# Altium PCB SignalAnalyse.PcbDoc (part 1 of 3)
Units mil, origin at the board's own origin, x right, y up, seen from the top; angles counter-clockwise.
Board outline 4204.03 x 1800 mil, 2 copper layers (Top Layer, Bottom Layer); 94 components, 52 nets, 372 pads, 56 vias.
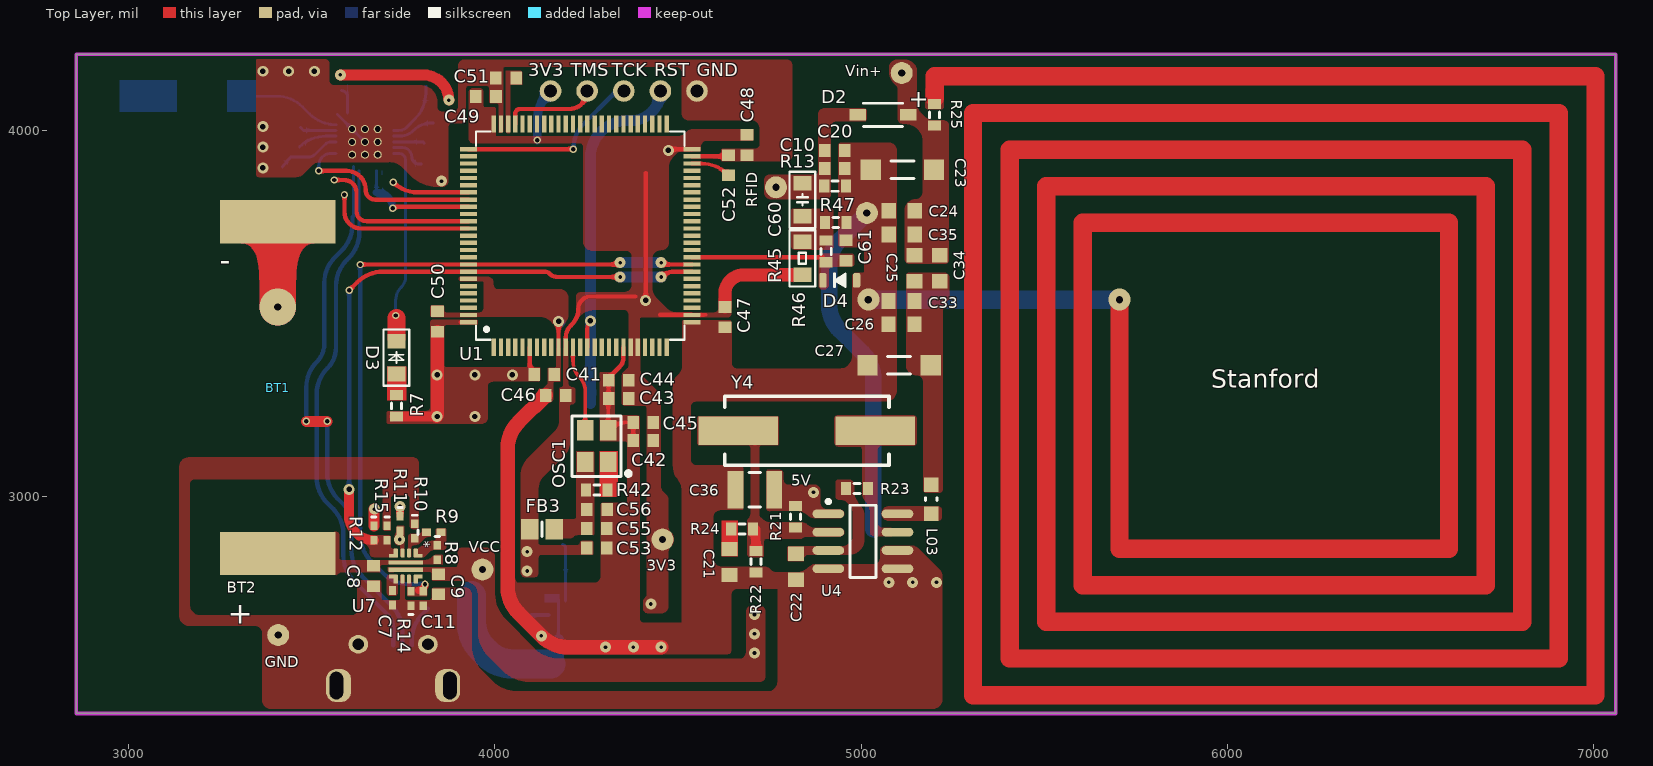
[diagram p0: Top Layer view]
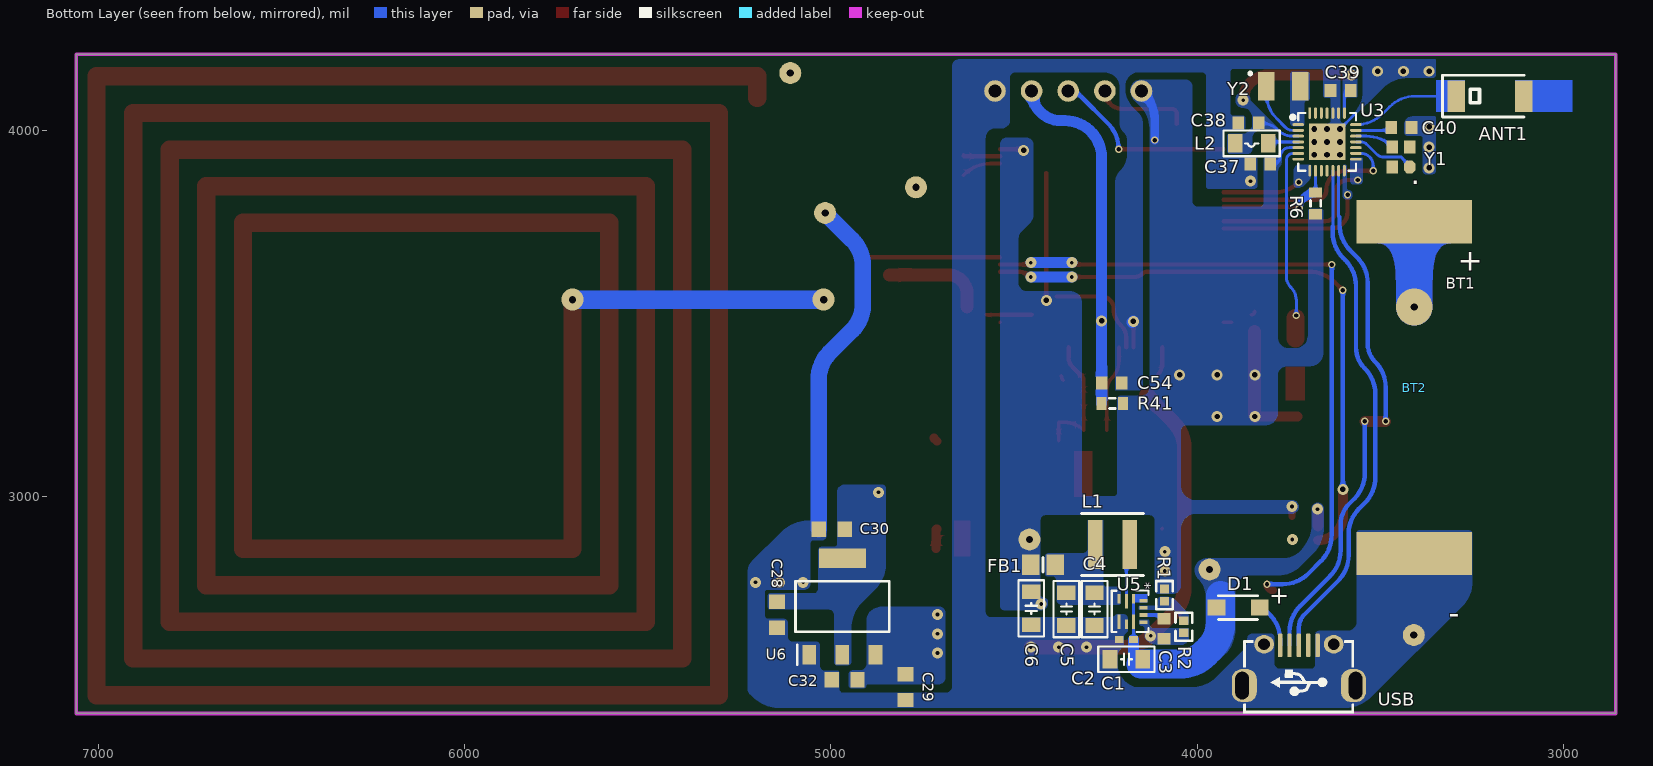
[diagram p1: Bottom Layer view, seen from below]

## Layer stack, top to bottom
Top Solder: solder mask 0.4, Solder Resist, Dk 3.5
Top Layer: signal copper 1.4
Dielectric 1: dielectric 12.6, FR-4, Dk 4.8
Bottom Layer: signal copper 1.4
Bottom Solder: solder mask 0.4, Solder Resist, Dk 3.5

## Board outline
2856.97,2407 7061,2407 7061,4207 2856.97,4207

## Design rules (kind name [scope] priority, off if disabled: settings)
Clearance [All] p1: gap=7 ignorepadtopadclearanceinfootprint=FALSE
PlaneClearance [All] p1: clearance=15
PlaneConnect [All] p1: planeconnectstyle=Direct reliefexpansion=20 reliefentries=4 reliefconductorwidth=10 reliefairgap=10
PolygonConnect [All] p1: connectstyle=Direct reliefconductorwidth=10 reliefentries=4 polygonreliefangle="90 Angle" airgapwidth=10
RoutingVias [All] p1: holewidth=15 width=30 viastyle="Through Hole" minholewidth=8 minwidth=20 maxholewidth=50 maxwidth=80
SolderMaskExpansion [All] p1: expansion=4
Width [All] p1: maxlimit=100 minlimit=7 preferedwidth=10
28 further rules are at their usual default settings.

## Classes and differential pairs
component class RFID_transmitter_V2: BT1 BT2 C1 C2 C3 C4 C5 C6 C7 C8 C9 C10 C11 C20 C21 C22 C23 C24 C25 C26 C27 C28 C29 C30 C32 C33 C34 C35 C36 D1 D2 FB1 L1 L03 R1 R2 R8 R9 R10 R11 R12 R13 R14 R15 R21 R22 R23 R24 R25 U4 U5 U6 U7 Y4
component class SignalAnalyse: ANT1 C37 C38 C39 C40 C41 C42 C43 C44 C45 C46 C47 C48 C49 C50 C51 C52 C53 C54 C55 C56 C60 C61 D3 D4 FB3 L2 OSC1 R6 R7 R41 R42 R45 R46 R47 U1 U3 USB Y1 Y2

## Components (designator, comment, footprint, x,y, rotation, side; value= is the part's Value field where it differs from the comment)
ANT1 "2450AT42A100E" ANTC5020X110N 3200,4093 r180 bottom
BT1 "Battery" Battery 3407,3297 r90 top
BT2 "Battery" Battery 3407,3297 r270 bottom
C1 "Multilayer Ceramic Capacitor" C0805 4193,2555 r0 bottom value=22uF
C2 "Cap Semi" 0402 4193.31,2609 r180 bottom value=2.2nF
C3 "Cap Semi" 1608[0603] 4090,2638 r90 bottom value=470nF
C4 "Multilayer Ceramic Capacitor" C0805 4280,2692 r270 bottom value=47uF
C5 "Multilayer Ceramic Capacitor" C0805 4357,2692 r270 bottom value=47uF
C6 "Multilayer Ceramic Capacitor" C0805 4453,2694 r270 bottom value=47uF
C7 "Cap Semi" 0402 3720.55,2723.02 r90 top value=1.3nF
C8 "Cap Semi" 1608[0603] 3668.55,2782.26 r90 top value=1μF
C9 "Cap Semi" 1608[0603] 3846.55,2759.7 r90 top value=10μF
C10 "Cap 100n" 1608[0603] 4928,3896 r0 top value=47nF
C11 "Cap Semi" 0402 3804.55,2720.7 r90 top value=100nF
C20 "Cap 100n" 1608[0603] 4928.56,3945 r0 top value=100nF
C21 "Cap 820p" 0603 4641,2820.57 r90 top value=820pF
C22 "Cap 200p" 0603 4822,2808 r90 top value=200pF
C23 "Cap Var" Variable_Capacitor_JZ400HV1 5113,3892 r0 top value=100pF
C24 "Cap" 0603 5111,3780 r0 top value=22pF
C25 "Cap" 0603 5146,3623 r270 top value=27pF
C26 "random value needs carefully address" 0603 5110.57,3470 r180 top value=470pF
C27 "Cap Var" Variable_Capacitor_JZ400HV1 5104,3358 r0 top value=100pF
C28 "Cap 100n" 0603 5147,2677 r90 bottom value=100nF
C29 "Cap 10u" 0603 4796,2479 r90 bottom value=10uF
C30 "Cap 22u" 0603 4998,2910 r180 bottom value=22uF
C32 "Cap 10n" 0603 4963,2499 r180 bottom value=10nF
C33 "random value needs carefully address" 0603 5110.57,3533 r180 top value=1pF
C34 "Cap" 0603 5215,3623 r270 top value=1pF
C35 "Cap" 0603 5111,3715 r0 top value=1pF
C36 "C3225C0G1H104JT000N" C1210 4710,3018.15 r180 top value=100nF
C37 "GRM188R61A226ME15D" 1608[0603] 3827.56,3908 r180 bottom value=2.2uF
C38 "GRM188R61A226ME15D" 1608[0603] 3859.44,4020 r180 bottom value=2.2uF
C39 "GRM188R61A226ME15D" 1608[0603] 3608.06,4108 r0 bottom value=0.1uF
C40 "GRM188R61A226ME15D" 1608[0603] 3442,4007 r0 bottom value=2.2uF
C41 "GRM188R61A226ME15D" 1608[0603] 4134.44,3333 r0 top value=1uF
C42 "GRM188R61A226ME15D" 1608[0603] 4405.44,3152 r180 top value=1uF
C43 "GRM188R61A226ME15D" 1608[0603] 4338,3267 r0 top value=1uF
C44 "GRM188R61A226ME15D" 1608[0603] 4338,3317 r0 top value=100nF
C45 "GRM188R61A226ME15D" 1608[0603] 4405.44,3202 r180 top value=100nF
C46 "GRM188R61A226ME15D" 1608[0603] 4166,3276 r0 top value=100nF
C47 "GRM188R61A226ME15D" 1608[0603] 4628,3489.56 r90 top value=100nF
C48 "GRM188R61A226ME15D" 1608[0603] 4688,3959.56 r90 top value=100nF
C49 "GRM188R61A226ME15D" 1608[0603] 3975.44,4092 r180 top value=100nF
C50 "GRM188R61A226ME15D" 1608[0603] 3843,3477.44 r270 top value=100nF
C51 "GRM188R61A226ME15D" 1608[0603] 4030.44,4142 r0 top value=2.2uF
C52 "GRM188R61A226ME15D" 1608[0603] 4638,3904.44 r270 top value=2.2uF
C53 "GRM188R61A226ME15D" 1608[0603] 4278.56,2859 r180 top value=4.7uF
C54 "GRM188R61A226ME15D" 1608[0603] 4233.44,3309 r180 bottom value=100nF
C55 "GRM188R61A226ME15D" 1608[0603] 4278.56,2912 r0 top value=10uF
C56 "GRM188R61A226ME15D" 1608[0603] 4279,2964 r0 top value=100nF
C60 "Cap Ceramic" C0805 4840,3810 r90 top value=22uF
C61 "Cap Semi" 1608[0603] 4959,3671.44 r270 top value=33nF
D1 "Diode" SODFL3616X98N 3888,2696 r180 bottom
D2 "Diode" SOD3716X135N 5060.1,4042 r0 top
D3 "LED-Green" D0805 3731,3379 r90 top
D4 "TDZ3V0J" SOD-323 4942,3590 r180 top
FB1 "Beed" BEADC2012X110N 4420.54,2813 r0 bottom
FB3 "Bead" BEADC2012X110N 4129,2910 r180 top
L1 "XGL4030" XGL4030 4231,2868 r180 bottom value=4.7uH
L2 "22uH" L0805 3851,3964 r0 bottom
L03 "Inductor 220 nH" Ferrite_bead_0805inch_2012mm 5192,2992 r90 top
OSC1 "16MHz" OSC_3.2X2.5 4278,3137 r90 top
R1 "14.7KΩ ±1%" LC-0402_R 4089,2730 r90 bottom
R2 "4.7KΩ ±1%" LC-0402_R 4036,2643.73 r90 bottom
R6 "Res 2.2KΩ ±1%" J1-0603 3676,3800 r90 bottom value=100K
R7 "Res 2.2KΩ ±1%" J1-0603 3731,3247 r90 top value=1K
R8 "Res 2.2KΩ ±1%" 0402-A 3842.55,2846.7 r270 top value=360K
R9 "Res 2.2KΩ ±1%" 0402-A 3833,2902 r0 top value=56K
R10 "Res 2.2KΩ ±1%" 0402-A 3780.99,2905 r270 top value=42.2K
R11 "Res 2.2KΩ ±1%" 0402-A 3741,2925.69 r270 top value=47K
R12 "Res 2.2KΩ ±1%" 0402-A 3669.55,2899.7 r270 top value=147K
R13 "Res 12.7KΩ ±1%" J1-0603 4929,3847 r180 top value=12.7K
R14 "Res 2.2KΩ ±1%" 0402-A 3770.55,2720.7 r90 top value=2.2K
R15 "Res 2.2KΩ ±1%" 0402-A 3705.55,2899.7 r270 top value=34K
R21 "Res 2.2KΩ ±1%" J1-0603 4821.15,2944.15 r90 top value=2.2K
R22 "Res 2.2KΩ ±1%" J1-0603 4713,2821.57 r90 top value=2.2K
R23 "Res 2.2KΩ ±1%" J1-0603 4989,3021 r0 top value=2.2K
R24 "Res 2.2KΩ ±1%" J1-0603 4675,2911 r180 top value=22Ohm
R25 "Res 2.2KΩ ±1%" J1-0603 5201,4042 r90 top value="1.0-antenna resistance value"
R41 "Res 2.2KΩ ±1%" J1-0603 4231.47,3254 r180 bottom value=10K
R42 "Res 2.2KΩ ±1%" J1-0603 4278.47,3017 r180 top value=1K
R45 "R" R0805 4840,3650 r90 top value=12K
R46 "Res 2.2KΩ ±1%" J1-0603 4905,3668.78 r270 top value=1K
R47 "Res 2.2KΩ ±1%" J1-0603 4931,3748 r0 top value=10K
U1 "STM32F767VIT6" STM32F767VIT6 4233,3712 r90 top value=Value
U3 "CH9143" QFN28_4X4 3644.98,3968.03 r270 bottom
U4 "LT1016" LT1016_SOIC 5005.16,2877.15 r0 top
U5 "XPS62912RPUR" VQFN-HR10_RPU_TEX 4183.12,2685.5 r270 bottom
U6 "LT1117IST-5#PBF" SOT230P700X180-4N 4969,2699 r90 bottom
U7 "LM73100RPWR" VQFN-HR-10_2X2_TEX 3756.55,2809.54 r270 top
USB "MicroUSB" USB_Micro-AB 3722,2493 r0 bottom
Y1 "32M" SMD2016-4N 3443,3927 r270 bottom
Y2 "32.768K" Q13FC1350000400 3765.06,4120 r180 bottom
Y4 "CRYSTAL" HC-49SMD 4852,3179 r180 top

## Footprints (in the part's own frame and the unit in brackets; to place one, negate y for a bottom-side part, rotate by r counter-clockwise, add the part's x,y. Pads: shape width x height; smd on the part's side, far side on the other; paste and mask are expansions set on the pad)
0402 [mm] "Chip Capacitor, Body 1.0x0.5mm, IPC High Density"
  rect 0.6x0.5 smd: 1(-0.5,0) 2(0.5,0)
  body extent -0.55,-0.3 0.55,0.3, height 1.3
0402-A [mm] "Chip Inductor, Body 1.0x0.5mm, IPC High Density"
  rect 0.6x0.5 smd: 1(-0.5,0) 2(0.5,0)
  silkscreen extent -1.1,-0.15 -1.1,0.15, body extent -0.55,-0.3 0.55,0.3, height 0.55
0603 [mm] "0603Resistor_Capacitor"
  rect 1x1.1 smd: 1(-0.9,0) 2(0.9,0)
  body extent -0.77,-0.45 0.77,0.45, height 0.45
1608[0603] [mm] "Chip Capacitor, Body 1.6x0.8mm, IPC High Density"
  rect 0.8x0.9 smd: 1(-0.7,0) 2(0.7,0)
  body extent -0.87,-0.48 0.87,0.48, height 1.3
ANTC5020X110N [mm]
  rect 1.2x2.2 smd: 1(-2.35,0) 2(2.35,0)
  silkscreen extent -3.3,-1.45 2.35,1.45, body extent -2.5,-1 2.5,1, height 1.1
Battery [mm]
  rect 3x8 smd: 1(-11.508,0) 2(11.508,0)
BEADC2012X110N [mm]
  rect 1.2x1.4 smd: 1(-0.85,0) 2(0.85,0)
  silkscreen extent 0,-0.5 0,0.5, body extent -1,-0.6 1,0.6, height 1.1
C0805 [mil]
  rect 40x50 smd: 1(45,0) 2(-45,0)
  silkscreen extent -77,-35 77,35, body extent -49,-24 49,25, height 31
C1210 [mm] "Chip Capacitor, Body 3.2x2.5mm, IPC High Density"
  rect 1.1x2.6 smd: 1(-1.35,0) 2(1.35,0)
  silkscreen extent -0.4,-1.2 0.4,1.2, body extent -1.7,-1.35 1.7,1.35, height 1.3
D0805 [mil]
  rect 40x50 smd: 1(-45,0) 2(45,0)
  silkscreen extent -77,-35 77,35, body extent -40,-25 40,25, height 43
Ferrite_bead_0805inch_2012mm [mm] "Ferrite_bead_MH2029-300Y"
  rect 1x1 smd: 1(-1,0) 2(1,0)
  silkscreen extent -0.1,-0.4 0.1,0.4, body extent -1.1,-0.7 1.1,0.7, height 1.1
HC-49SMD [mm] "HC49/4HSMX"
  rect 5.5x2 smd: 1(-4.75,0) 2(4.75,0)
  silkscreen extent -5.7,-2.4 5.7,2.4, body extent -6.7,-2.46 6.7,2.44, height 4.3
J1-0603 [mm] "Chip Resistor, Body 1.6x0.8mm, IPC High Density"
  rect 0.7x0.9 smd: 1(-0.75,0) 2(0.75,0)
  silkscreen extent -0.2,-0.35 0.2,0.35, body extent -0.85,-0.48 0.85,0.48, height 0.9
L0805 [mil]
  rect 40x50 smd: 1(45,0) 2(-45,0)
  silkscreen extent -77,-35 77,35, body extent -49,-24 49,25, height 31
LC-0402_R [mm]
  rect 0.6x0.65 smd mask+0.051: 1(-0.425,0) 2(0.425,0)
  silkscreen extent -0.97,-0.58 0.97,0.58, body extent -0.57,-0.27 0.57,0.28, height 0.41
LT1016_SOIC [mm] "LT1016_Comparator_SOIC"
  oval 2.2x0.6 smd: 1(-2.4,1.905) 2(-2.4,0.635) 3(-2.4,-0.635) 4(-2.4,-1.905) 5(2.4,-1.905) 6(2.4,-0.635) 7(2.4,0.635) 8(2.4,1.905)
  silkscreen extent -2.52,-2.5 0.9,2.88, body extent -2,-2.5 2,2.5, height 1.76
OSC_3.2X2.5 [mm] "SG-310SCF SMD-3225_4P"
  rect 1.4x1.15 smd: 1(-1.1,-0.8) 2(1.1,-0.8) 3(1.1,0.8) 4(-1.1,0.8)
  silkscreen extent -2.1,-2.35 2.1,1.7, body extent -1.6,-1.25 1.6,1.25, height 0.61
Q13FC1350000400 [mm] "FC-135, 2-Leads, Body 1.50x3.20mm, Pitch 2.35mm, IPC Medium Density"
  rect 1.15x1.95 smd: 1(-1.175,0) 2(1.175,0)
  silkscreen extent -2.39,0.79 -2.19,0.99, body extent -1.67,-0.9 1.68,0.9, height 0.9
QFN28_4X4 [mm]
  round 0.559 hole 0.406: 0(-0.888,-0.89) 0(-0.888,-0.002) 0(-0.888,0.885) 0(0.001,-0.89) 0(0.001,-0.002) 0(0.001,0.885) 0(0.89,-0.89) 0(0.89,-0.002) 0(0.89,0.885)
  rect 2.54x2.54 smd: 0(0,0)
  oval 0.2x0.8 smd: 1(-1.2,-2) 2(-0.8,-2) 3(-0.4,-2) 4(0,-2) 5(0.4,-2) 6(0.8,-2) 7(1.2,-2) 15(1.2,2) 16(0.8,2) 17(0.4,2) 18(0,2) 19(-0.4,2) 20(-0.8,2) 21(-1.2,2)
  oval 0.8x0.2 smd: 8(2,-1.2) 9(2,-0.8) 10(2,-0.4) 11(2,0) 12(2,0.4) 13(2,0.8) 14(2,1.2) 22(-2,1.2) 23(-2,0.8) 24(-2,0.4) 25(-2,0) 26(-2,-0.4) 27(-2,-0.8) 28(-2,-1.2)
  silkscreen extent -2,-2.51 2,2
R0805 [mil]
  rect 40x50 smd: 1(45,0) 2(-45,0)
  silkscreen extent -77,-35 77,35, body extent -39,-25 39,25, height 31
SMD2016-4N [mm]
  oct 0.9x0.8 smd: 1(0.7,0.6)
  rect 0.9x0.8 smd: 2(-0.7,0.6) 3(-0.7,-0.6) 4(0.7,-0.6)
  body extent -0.85,-1 0.85,1, height 0.5
SOD3716X135N [mm]
  rect 1.15x0.8 smd: 1(-1.75,0) 2(1.75,0)
  silkscreen extent -1.35,-0.8 1.35,0.8, body extent -1.86,-0.8 1.86,0.8, height 1.35
SOD-323 [mil]
  rrect50% 20x40 smd: 1(-46,0) 2(46,0)
  silkscreen extent -16,-18 16,18, body extent -51,-27 51,27, height 43
SODFL3616X98N [mm]
  rect 1.24x1.12 smd: 1(-1.5,0) 2(1.5,0)
  silkscreen extent -1.35,-0.82 1.35,0.82, body extent -1.8,-0.83 1.8,0.83, height 0.98
SOT230P700X180-4N [mm]
  rect 1.35x0.95 smd: 1(-3.35,2.3) 2(-3.35,0) 3(-3.35,-2.3)
  rect 1.35x3.25 smd: 4(3.35,0)
  silkscreen extent -4.03,-3.25 1.75,3.25, body extent -3.5,-3.25 3.5,3.25, height 1.8
STM32F767VIT6 [mm] "LQPF100, 100-Leads, Body 14.00x14.00mm, Pitch 0.50mm, IPC Medium Density"
  rect 1.2x0.3 smd: 1(-7.75,6) 2(-7.75,5.5) 3(-7.75,5) 4(-7.75,4.5) 5(-7.75,4) 6(-7.75,3.5) 7(-7.75,3) 8(-7.75,2.5) 9(-7.75,2) 10(-7.75,1.5) 11(-7.75,1) 12(-7.75,0.5) 13(-7.75,0) 14(-7.75,-0.5) 15(-7.75,-1) 16(-7.75,-1.5) 17(-7.75,-2) 18(-7.75,-2.5) 19(-7.75,-3) 20(-7.75,-3.5) 21(-7.75,-4) 22(-7.75,-4.5) 23(-7.75,-5) 24(-7.75,-5.5) 25(-7.75,-6) 51(7.75,-6) 52(7.75,-5.5) 53(7.75,-5) 54(7.75,-4.5) 55(7.75,-4) 56(7.75,-3.5) 57(7.75,-3) 58(7.75,-2.5) 59(7.75,-2) 60(7.75,-1.5) 61(7.75,-1) 62(7.75,-0.5) 63(7.75,0) 64(7.75,0.5) 65(7.75,1) 66(7.75,1.5) 67(7.75,2) 68(7.75,2.5) 69(7.75,3) 70(7.75,3.5) 71(7.75,4) 72(7.75,4.5) 73(7.75,5) 74(7.75,5.5) 75(7.75,6)
  rect 0.3x1.2 smd: 26(-6,-7.75) 27(-5.5,-7.75) 28(-5,-7.75) 29(-4.5,-7.75) 30(-4,-7.75) 31(-3.5,-7.75) 32(-3,-7.75) 33(-2.5,-7.75) 34(-2,-7.75) 35(-1.5,-7.75) 36(-1,-7.75) 37(-0.5,-7.75) 38(0,-7.75) 39(0.5,-7.75) 40(1,-7.75) 41(1.5,-7.75) 42(2,-7.75) 43(2.5,-7.75) 44(3,-7.75) 45(3.5,-7.75) 46(4,-7.75) 47(4.5,-7.75) 48(5,-7.75) 49(5.5,-7.75) 50(6,-7.75) 76(6,7.75) 77(5.5,7.75) 78(5,7.75) 79(4.5,7.75) 80(4,7.75) 81(3.5,7.75) 82(3,7.75) 83(2.5,7.75) 84(2,7.75) 85(1.5,7.75) 86(1,7.75) 87(0.5,7.75) 88(0,7.75) 89(-0.5,7.75) 90(-1,7.75) 91(-1.5,7.75) 92(-2,7.75) 93(-2.5,7.75) 94(-3,7.75) 95(-3.5,7.75) 96(-4,7.75) 97(-4.5,7.75) 98(-5,7.75) 99(-5.5,7.75) 100(-6,7.75)
  silkscreen extent -7.23,-7.23 7.23,7.23, body extent -8,-8 8,8, height 1.6
USB_Micro-AB [mil]
  rrect80% 68x90 hole 37 slot 75 at 90 deg copper offset 6,0 mask+0: 0(-155,10)
  oval 54x50 hole 32 mask+0: 0(-95,-103) 0(95,-103)
  rrect80% 68x90 hole 37 slot 75 at 90 deg copper offset -6,0 mask+0: 0(155,10)
  rrect50% 12x64 smd: 1(51.18,-100) 2(25.59,-100) 3(0,-100) 4(-25.59,-100) 5(-51.18,-100)
  silkscreen extent -150,-112 150,86, body extent -161,-109 161,104, height 108
Variable_Capacitor_JZ400HV1 [mm] "Variable_Capacitor_JZ400HV"
  rect 1.4x1.4 smd: 1(-2.2,0) 2(2.2,0)
  silkscreen extent -0.8,-0.6 0.8,0.6, body extent -3.3,-1.72 3.05,1.73, height 1.45
VQFN-HR10_RPU_TEX [mil]
  rect 26x8 smd paste-4 mask+0: 1(-34.5,9.88) 3(-34.5,-29.62) 5(34.5,-9.88)
  rect 39x8 smd: 2(-28,-9.87) 4(28,-29.63) 6(28,9.87)
  rect 10x22 smd: 7(29.63,36.37) 8(9.88,36.38) 9(-9.87,36.38) 10(-29.62,36.38)
  silkscreen extent -57,-50 57,50, body extent -41,-40 41,40, height 39
VQFN-HR-10_2X2_TEX [mm]
  rrect17% 0.6x0.3 smd paste+0 mask+0.05: 1(-0.9,0.7) 4(-0.9,-0.7) 7(0.9,-0.7) 10(0.9,0.7)
  rrect20% 0.25x0.6 smd paste+0 mask+0.05: 1(-0.725,0.875) 4(-0.725,-0.875) 7(0.725,-0.875) 10(0.725,0.875)
  rrect20% 0.6x0.25 smd paste+0 mask+0.05: 2(-0.9,0.225) 3(-0.9,-0.225) 8(0.9,-0.225) 9(0.9,0.225)
  rrect17% 0.3x2.4 smd paste+0 mask+0.05: 5(-0.25,0) 6(0.25,0)
  body extent -1,-1 1,1, height 1
XGL4030 [mm] "Precision Wire Wound Inductor, 2-Leads, Body 4.00x4.00mm, IPC Medium Density"
  rect 1x3.4 smd: 1(-1.185,0) 2(1.185,0)
  silkscreen extent -2.15,-2.15 2.15,2.15, body extent -2.15,-2.15 2.15,2.15, height 3

## Part data
ANT1: "Antenna", Manufacturer_Name="JOHANSON TECHNOLOGY", Mouser Part Number=609-2450AT42A100E, Arrow Part Number=2450AT42A100E, Arrow Price/Stock=https://www.arrow.com/en/products/2450at42a100e/johanson-dielectrics, Datasheet Link=https://mouser.componentsearchengine.com/Datasheets/2/2450AT42A100E.pdf, Height=1.1mm, Manufacturer_Part_Number=2450AT42A100E, Mouser Price/Stock=https://www.mouser.co.uk/ProductDetail/Johanson-Technology/2450AT42A100E/?qs=yCnrNFeXz%252BhaJmvBFFPWJQ%3D%3D
BT1 BT2: "Multicell Battery", LatestRevisionDate=17-Jul-2002, LatestRevisionNote="Re-released for DXP Platform.", PackageDescription="Battery; 2 Leads", PackageReference=BAT-2, Published=24-Mar-1999, Publisher="Altium Limited"
C1: library part C-Ceramic, Manufacturer=TDK, Part Number=C2012X5R1V226M125AC, Voltage=35V
C2: "Capacitor (Semiconductor SIM Model)", Manufacturer=MuRata, Part Number=GRM155R71H222KA01D, Voltage=50V, LatestRevisionDate=29-May-2009, LatestRevisionNote="IPC-7351 Footprint Added.", PackageDescription="Chip Capacitor", PackageReference=C1206, Published=8-Jun-2000, Publisher="Altium Limited"
C3: "Capacitor (Semiconductor SIM Model)", Manufacturer=MuRata, Part Number=GRM188R60J474KA01D, Voltage=6.3V, LatestRevisionDate=29-May-2009, LatestRevisionNote="IPC-7351 Footprint Added.", PackageDescription="Chip Capacitor", PackageReference=C1206, Published=8-Jun-2000, Publisher="Altium Limited"
C4 C5 C6: library part C-Ceramic, Manufacturer=TDK, Part Number=C2012X5R1A476M125AC, Voltage=10V
C7: "多层陶瓷电容器MLCC - SMD/SMT 1.3nF 50VDC X7R 5% 0402", Manufacturer=MuRata, Part Number=GRM155R71H132JA01D, Voltage=50V, LatestRevisionDate=29-May-2009, LatestRevisionNote="IPC-7351 Footprint Added.", PackageDescription="Chip Capacitor", PackageReference=C1206, Published=8-Jun-2000, Publisher="Altium Limited"
C8: "多层陶瓷电容器MLCC - SMD/SMT 0603 1uF 25V X6S 10%", Manufacturer=MuRata, Part Number=GRM188C81E105KAADD, Voltage=25V, LatestRevisionDate=29-May-2009, LatestRevisionNote="IPC-7351 Footprint Added.", PackageDescription="Chip Capacitor", PackageReference=C1206, Published=8-Jun-2000, Publisher="Altium Limited"
C9: "Capacitor (Semiconductor SIM Model)", Manufacturer=MuRata, Part Number=GRM188R61E106KA73D, Voltage=25V, LatestRevisionDate=29-May-2009, LatestRevisionNote="IPC-7351 Footprint Added.", PackageDescription="Chip Capacitor", PackageReference=C1206, Published=8-Jun-2000, Publisher="Altium Limited"
C10: library part "Cap Semi", "Capacitor", Manufacturer=SAMSUNG, Part Number=CL10B473KB8NNNC, Voltage=50V, LatestRevisionDate=29-May-2009, LatestRevisionNote="IPC-7351 Footprint Added.", PackageDescription="Chip Capacitor", PackageReference=C1206, Published=8-Jun-2000, Publisher="Altium Limited"
C11: "多层陶瓷电容器MLCC - SMD/SMT 100nF 10VDC X5R 5% 0402", Manufacturer=MuRata, Part Number=GRM155R61A104JA01D, Voltage=10V, LatestRevisionDate=29-May-2009, LatestRevisionNote="IPC-7351 Footprint Added.", PackageDescription="Chip Capacitor", PackageReference=C1206, Published=8-Jun-2000, Publisher="Altium Limited"
C20: library part "Cap Semi", "Capacitor", Manufacturer=SAMSUNG, Part Number=CL10B104KB8NNNC, Voltage=50V, LatestRevisionDate=29-May-2009, LatestRevisionNote="IPC-7351 Footprint Added.", PackageDescription="Chip Capacitor", PackageReference=C1206, Published=8-Jun-2000, Publisher="Altium Limited"
C21 C22 C28 C30 C32: library part Cap, "Capacitor", LatestRevisionDate=17-Jul-2002, LatestRevisionNote="Re-released for DXP Platform.", PackageDescription="Radial Cap, Thru-Hole; 2 Leads; 0.3 in Pin Spacing", PackageReference=RAD-0.3, Published=8-Jun-2000, Publisher="Altium Limited"
C23 C27: "Variable or Adjustable Capacitor", Code_IPC=CAPC3225, Code_JEITA=1210, LatestRevisionDate=29-May-2009, LatestRevisionNote="IPC-7351 Footprint Added.", PackageDescription="Chip Capacitor 1210 Case Size", PackageReference=C1210, Published=24-Mar-1999, Publisher="Altium Limited"
C24 C25 C34 C35: "Capacitor_for resonance", LatestRevisionDate=17-Jul-2002, LatestRevisionNote="Re-released for DXP Platform.", PackageDescription="Radial Cap, Thru-Hole; 2 Leads; 0.3 in Pin Spacing", PackageReference=RAD-0.3, Published=8-Jun-2000, Publisher="Altium Limited"
C26 C33: library part Cap, "Capacitor_for resonance", LatestRevisionDate=17-Jul-2002, LatestRevisionNote="Re-released for DXP Platform.", PackageDescription="Radial Cap, Thru-Hole; 2 Leads; 0.3 in Pin Spacing", PackageReference=RAD-0.3, Published=8-Jun-2000, Publisher="Altium Limited"
C29: library part Cap, "Capacitor", Manufacturer=Murata, Part Number=GRM188R61E106KA73D, LatestRevisionDate=17-Jul-2002, LatestRevisionNote="Re-released for DXP Platform.", PackageDescription="Radial Cap, Thru-Hole; 2 Leads; 0.3 in Pin Spacing", PackageReference=RAD-0.3, Published=8-Jun-2000, Publisher="Altium Limited"
C36: library part "Cap Semi", "Capacitor (Semiconductor SIM Model)", Manufacturer=TDK, Voltage=10V, LatestRevisionDate=29-May-2009, LatestRevisionNote="IPC-7351 Footprint Added.", PackageDescription="Chip Capacitor", PackageReference=C1206, Part Number=C3225C0G1H104JT000N, Published=8-Jun-2000, Publisher="Altium Limited"
C37 C38 C39 C40 C53: library part "Cap Semi", "Capacitor (Semiconductor SIM Model)", Voltage=10V, LatestRevisionDate=29-May-2009, LatestRevisionNote="IPC-7351 Footprint Added.", PackageDescription="Chip Capacitor", PackageReference=C1206, Published=8-Jun-2000, Publisher="Altium Limited"
C41 C42 C43 C44 C45 C46 C47 C48 C49 C50 C54 C56: library part "Cap Semi", "Capacitor (Semiconductor SIM Model)", Voltage=50V, LatestRevisionDate=29-May-2009, LatestRevisionNote="IPC-7351 Footprint Added.", PackageDescription="Chip Capacitor", PackageReference=C1206, Published=8-Jun-2000, Publisher="Altium Limited"
C51 C52: library part "Cap Semi", "Capacitor (Semiconductor SIM Model)", Voltage=16V, LatestRevisionDate=29-May-2009, LatestRevisionNote="IPC-7351 Footprint Added.", PackageDescription="Chip Capacitor", PackageReference=C1206, Published=8-Jun-2000, Publisher="Altium Limited"
C55: library part "Cap Semi", "Capacitor (Semiconductor SIM Model)", Manufacturer=Murata, Part Number=GRM188R61E106KA73D, Voltage=10V, LatestRevisionDate=29-May-2009, LatestRevisionNote="IPC-7351 Footprint Added.", PackageDescription="Chip Capacitor", PackageReference=C1206, Published=8-Jun-2000, Publisher="Altium Limited"
C60: library part C-Ceramic, Voltage=25V
C61: "Capacitor (Semiconductor SIM Model)", Voltage=50V, LatestRevisionDate=29-May-2009, LatestRevisionNote="IPC-7351 Footprint Added.", PackageDescription="Chip Capacitor", PackageReference=C0603, Published=8-Jun-2000, Publisher="Altium Limited"
D1: library part MBR120VLSFT1G, "Schottky Power Rectifier, Surface Mount", Manufacturer_Name="ON Semiconductor", Mouser Part Number=863-MBR120VLSFT1G, Arrow Part Number=MBR120VLSFT1G, Arrow Price/Stock=https://www.arrow.com/en/products/mbr120vlsft1g/on-semiconductor, Datasheet Link=http://www.onsemi.com/pub/Collateral/MBR120VLSFT1-D.PDF, Height=0.98mm, Manufacturer_Part_Number=MBR120VLSFT1G, Mouser Price/Stock=https://www.mouser.co.uk/ProductDetail/ON-Semiconductor/MBR120VLSFT1G?qs=3JMERSakebpX%252BkItPpFCkg%3D%3D
D2: library part MBR0540T1G, "Surface Mount Schottky Power Rectifier", Manufacturer_Name="ON Semiconductor", Mouser Part Number=863-MBR0540T1G, Arrow Part Number=MBR0540T1G, Arrow Price/Stock=https://www.arrow.com/en/products/mbr0540t1g/on-semiconductor, Datasheet Link=http://www.onsemi.com/pub/Collateral/MBR0540T1-D.PDF, Height=1.35mm, Manufacturer_Part_Number=MBR0540T1G, Mouser Price/Stock=https://www.mouser.co.uk/ProductDetail/ON-Semiconductor/MBR0540T1G?qs=3JMERSakebqeY0cO5%252BUPCQ%3D%3D
D3: library part LED
D4: library part "D Zener", "Zener Diode 3V", LatestRevisionDate=17-Jul-2002, LatestRevisionNote="Re-released for DXP Platform.", PackageDescription="Diode, Thru-Hole; 2 Leads; 0.7 in Pin Spacing", PackageReference=DIODE-0.7, Published=8-Jun-2000, Publisher="Altium Limited"
FB1 FB3: library part 782853200, "Wurth Ferrite Bead", Manufacturer_Name="Wurth Elektronik", Datasheet Link=http://katalog.we-online.de/pbs/datasheet/782853200.pdf, Height=1.1mm, Manufacturer_Part_Number=782853200
L1: library part Inductor, "Coilcraft Shielded Power Inductors", Manufacturer=Coilcraft, Part Number=XGL4030-472MEC
L2: library part FB, Manufacturer=microgate, Part Number=MGFL2012F220
L03: library part Component_1, "220nH"
OSC1: library part OSC2, "OSC with disable function"
R1: library part "0402 1KΩ (1001) 1%", "贴片电阻", Manufacturer=Vishay-Dale, Package=0402, Part Number=CRCW040214K7FKED, ComponentLink1Description=供应商链接, ComponentLink1URL=http://www.szlcsc.com/product/details_12256.html
R2: library part "0402 1KΩ (1001) 1%", "贴片电阻", Manufacturers=Vishay-Dale, Package=0402, Part Number=CRCW04024K70FKED, ComponentLink1Description=供应商链接, ComponentLink1URL=http://www.szlcsc.com/product/details_12256.html
R6: library part Res1, "Resistor", Manufacturer=YAGEO, Part Number=RC0603FR-07100KL, LatestRevisionDate=17-Jul-2002, LatestRevisionNote="Re-released for DXP Platform.", PackageDescription="Axial Device, Thru-Hole; 2 Leads; 0.3 in Pin Spacing", PackageReference=AXIAL-0.3, Published=8-Jun-2000, Publisher="Altium Limited"
R7 R42 R46: library part Res1, "Resistor", Manufacturer=YAGEO, Part Number=RC0603FR-071KL, LatestRevisionDate=17-Jul-2002, LatestRevisionNote="Re-released for DXP Platform.", PackageDescription="Axial Device, Thru-Hole; 2 Leads; 0.3 in Pin Spacing", PackageReference=AXIAL-0.3, Published=8-Jun-2000, Publisher="Altium Limited"
R8: library part Res1, "Resistor", Manufacturer=YAGEO, Part Number=RC0402FR-07360KL, LatestRevisionDate=17-Jul-2002, LatestRevisionNote="Re-released for DXP Platform.", PackageDescription="Axial Device, Thru-Hole; 2 Leads; 0.3 in Pin Spacing", PackageReference=AXIAL-0.3, Published=8-Jun-2000, Publisher="Altium Limited"
R9: library part Res1, "Resistor", Manufacturer=YAGEO, Part Number=RC0402FR-0756KL, LatestRevisionDate=17-Jul-2002, LatestRevisionNote="Re-released for DXP Platform.", PackageDescription="Axial Device, Thru-Hole; 2 Leads; 0.3 in Pin Spacing", PackageReference=AXIAL-0.3, Published=8-Jun-2000, Publisher="Altium Limited"
R10 R21 R22 R23: library part Res1, "Resistor", Manufacturer=YAGEO, Part Number=RC0603FR-072K2L, LatestRevisionDate=17-Jul-2002, LatestRevisionNote="Re-released for DXP Platform.", PackageDescription="Axial Device, Thru-Hole; 2 Leads; 0.3 in Pin Spacing", PackageReference=AXIAL-0.3, Published=8-Jun-2000, Publisher="Altium Limited"
R11: library part Res1, "Resistor", Manufacturer=YAGEO, Part Number=RC0402FR-0747KL, LatestRevisionDate=17-Jul-2002, LatestRevisionNote="Re-released for DXP Platform.", PackageDescription="Axial Device, Thru-Hole; 2 Leads; 0.3 in Pin Spacing", PackageReference=AXIAL-0.3, Published=8-Jun-2000, Publisher="Altium Limited"
R12: library part Res1, "Resistor", Manufacturer=YAGEO, Part Number=RC0402FR-07147KL, LatestRevisionDate=17-Jul-2002, LatestRevisionNote="Re-released for DXP Platform.", PackageDescription="Axial Device, Thru-Hole; 2 Leads; 0.3 in Pin Spacing", PackageReference=AXIAL-0.3, Published=8-Jun-2000, Publisher="Altium Limited"
R13: library part Res3, "Resistor", Manufacturer=YAGEO, Part Number=RC0603FR-0712K7L, LatestRevisionDate=29-May-2009, LatestRevisionNote="IPC-7351 Footprint Added.", PackageDescription="Chip Resistor", PackageReference=J1-0603, Published=8-Jun-2000, Publisher="Altium Limited"
R14: library part Res1, "Resistor", Manufacturer=YAGEO, Part Number=RC0402FR-072K2L, LatestRevisionDate=17-Jul-2002, LatestRevisionNote="Re-released for DXP Platform.", PackageDescription="Axial Device, Thru-Hole; 2 Leads; 0.3 in Pin Spacing", PackageReference=AXIAL-0.3, Published=8-Jun-2000, Publisher="Altium Limited"
R15: library part Res1, "Resistor", Manufacturer=YAGEO, Part Number=RC0402FR-0734KL, LatestRevisionDate=17-Jul-2002, LatestRevisionNote="Re-released for DXP Platform.", PackageDescription="Axial Device, Thru-Hole; 2 Leads; 0.3 in Pin Spacing", PackageReference=AXIAL-0.3, Published=8-Jun-2000, Publisher="Altium Limited"
R24: library part Res1, "Resistor", Manufacturer=YAGEO, Part Number=RC0603FR-0722RL, LatestRevisionDate=17-Jul-2002, LatestRevisionNote="Re-released for DXP Platform.", PackageDescription="Axial Device, Thru-Hole; 2 Leads; 0.3 in Pin Spacing", PackageReference=AXIAL-0.3, Published=8-Jun-2000, Publisher="Altium Limited"
R25: library part Res1, "Resistor", Manufacturer=YAGEO, Part Number=RC0603FR-071RL, LatestRevisionDate=17-Jul-2002, LatestRevisionNote="Re-released for DXP Platform.", PackageDescription="Axial Device, Thru-Hole; 2 Leads; 0.3 in Pin Spacing", PackageReference=AXIAL-0.3, Published=8-Jun-2000, Publisher="Altium Limited"
R41 R47: library part Res1, "Resistor", Manufacturer=YAGEO, Part Number=RC0603FR-0710KL, LatestRevisionDate=17-Jul-2002, LatestRevisionNote="Re-released for DXP Platform.", PackageDescription="Axial Device, Thru-Hole; 2 Leads; 0.3 in Pin Spacing", PackageReference=AXIAL-0.3, Published=8-Jun-2000, Publisher="Altium Limited"
R45: library part "Res SMT", Manufacturer=YAGEO, Part Number=RC0805FR-0712KL
U1: library part STM32F76XVXT, "Imported", Manufacturer_Part_Number=stm32f76xvxt, C="Copyright (C) 2016 Accelerated Designs. All rights reserved", Copyright="Copyright (C) 2016 Accelerated Designs. All rights reserved", RefDes=RefDes, Type=Type, Vendor=STMicroelectronics
U3: "Bluetooth-LowEnergy & UART & USB Mutual Transport"
U5 U7: "No Description Available", Copyright="Copyright (C) 2018 Accelerated Designs. All rights reserved", RefDes=RefDes, Type=DEV, Vendor="Texas Instruments"
  U5: Built_By=EMA_Cory, Datasheet=https://www.ti.com/lit/ds/symlink/tps62913.pdf?ts=1598546293590&ref_url=https%253A%252F%252Fwww.ti.com%252Fproduct%252FTPS62913, Manufacturer_Part_Number=XPS62912RPUR, SourceLibrary=TI_2020-08-27
  U7: Built_By=EMA_Anthony, Datasheet=https://www.ti.com/lit/ds/symlink/lm7310.pdf?ts=1603393347029&ref_url=https%253A%252F%252Fwww.ti.com%252Fproduct%252FLM7310%253FHQS%253DTI-null-null-octopart-df-pf-null-wwe, Manufacturer_Part_Number=LM73100RPWR, SourceLibrary=Add_to_database_2020-10-23
USB: library part USB_Micro, "USB", Type=B-type
Y1: library part X201632MMB4SI, "Quartz Crystal Oscillator", Manufacturer_Name="Yangxing Tech", Datasheet Link=https://datasheet.lcsc.com/szlcsc/1904031205_Yangxing-Tech-X201632MMB4SI_C383840.pdf, Height=0.5mm, Manufacturer_Part_Number=X201632MMB4SI
Y2: library part Q13FC1350000400, "Crystal Oscillator", Manufacturer_Name="SEIKO EPSON", Datasheet Link=https://datasheet.lcsc.com/szlcsc/1901081604_Seiko-Epson-Q13FC1350000400_C32346.pdf, Height=0.9mm, Manufacturer_Part_Number=Q13FC1350000400
Y4: "Industry standard SMD crystal", Frequency=6.78M, Manufacturer=IQD, Part Number=LFXTAL057410Bulk

## Free pads (board coordinates)
  round 60 hole 20: 0(3408,2621) 0(3966,2800) 0(4458,2882) 2(4768,3844) 2(5016,3774) 2(5111,4156)
  round 59.06 hole 35.43: 1(4152,4107) 2(4252,4107) 3(4352,4107) 4(4452.01,4107) 5(4552.01,4107)

## Via types
v1: diameter 30, hole 10, Top Layer to Bottom Layer, tented both sides, 22 vias
v2: diameter 30, hole 15, Top Layer to Bottom Layer, tented both sides, 16 vias
v3: diameter 20, hole 12, Top Layer to Bottom Layer, tented both sides, 13 vias
v4: diameter 30, hole 10, Top Layer to Bottom Layer, 2 vias
v5: diameter 60, hole 20, Top Layer to Bottom Layer, 2 vias
v6: diameter 100, hole 20, Top Layer to Bottom Layer, 1 vias

## Nets (pads, with @x,y where several pads share a name; then routed paths per layer and width w, separated by ;. In a path a pad name is that pad's centre, name@x,y a point inside that pad or via, vN(x,y) a via of type N, cw(c..) or ccw(c..) an arc to the next point about the centre after c; other vN are vias at no path point)
3.3V: C6.2 C37.2 C41.1 C42.1 C43.2 C44.2 C45.1 C46.2 C47.2 C48.2 C49.2 C50.2 C53.2 FB1.2 FB3.2 pad.0@4458,2882 pad.1 R1.2 R6.1 R7.1 R11.1 R41.2 R45.2 U1.6 U1.11 U1.20 U1.21 U1.27 U1.50 U1.75 U1.100 U3.5 | length 1839.2
  Top Layer w10: U1.100@3905.52,3475.78 U1.100@3927.88,3475.78 ; FB3.2@4095,2912 FB3.2@4096,2911 ; C44.2@4365.56,3317 ccw(c4352.92,3329.64) C44.2@4370.8,3329.64 ; U1.27@4538.12,3495.46 4575.72,3495.46
  Top Layer w11.81: U1.6@4095.2,3406.88 4095.2,3361.19 ccw(c4135.07,3361.19) C41.1@4106.88,3333 ; U1.11@4193.63,3406.88 4193.63,3433.72 cw(c4239.28,3433.72) 4207,3466 4210.32,3469.32 ccw(c4167.64,3512) 4228,3512 cw(c4262,3512) 4262,3546 4383,3546
  Top Layer w12: v2(4412,3535) 4412,3883 ; 4451.54,3495.46 U1.27@4538.12,3495.46 ; v2(4474,3945) cw(c4477.22,3945) 4477.22,3948.22 U1.50@4538.12,3948.22
  Top Layer w20: R11.1@3741,2945.37 v1(3741,2972)
  Top Layer w27.56: R7.1@3726,3218.53 v2@3840.73,3218.53
  Top Layer w35.43: v2@3840.73,3218.53 ccw(c3835.24,3224.02) 3843,3224.02 C50.2@3843,3449.88 ; C47.2@4628,3517.12 4628,3553 cw(c4680,3553) 4680,3605 R45.2@4840,3605
  Bottom Layer w8: U3.5@3723.72,3952.28 3747.72,3952.28 cw(c3747.72,3927) 3773,3927 ccw(c3792,3927) 3792,3908 C37.2@3800,3908
  Bottom Layer w23.62: v3(4116,3973) 4116,4029.58 cw(c4216,4029.58) 4145.29,4100.29 pad.1@4152,4107
  other v1: 4426,2706 4088,2796 4088,2849
  other v2: 3842,3218 3945,3218 3842,3332 3945,3332 4048,3332
ADC: C61.2 D4.2 R46.2 U1.35 | length 357.8
  Top Layer w11.81: U1.35@4538.12,3652.95 R46.2@4895.94,3652.95
ANT: ANT1.1 U3.21 | length 297.3
  Bottom Layer w7.32: ANT1.1@3292.52,4093 3403.58,4093 cw(c3403.58,3993) 3474.29,4063.71 3493.44,4044.56 ccw(c3564.15,4115.28) 3564.15,4015.28 U3.21@3566.24,4015.28
B\T\_\R\S\T\: U1.83 U3.16 | length 534.5
  Top Layer w11.81: v3(3519,3889) 3595,3889 cw(c3595,3837) 3647,3837 ccw(c3673.57,3837) 3673.57,3810.43 U1.83@3927.88,3810.43
  Bottom Layer w8: v3(3519,3889) 3519,3903.93 cw(c3551.61,3903.93) 3519.47,3909.46 cw(c3551.61,3903.93) 3547.12,3936.23 cw(c3551.61,3903.93) 3551.61,3936.54 U3.16@3566.24,3936.54
BT_AT: U1.82 U3.8 | length 224.9
  Top Layer w11.81: v3(3722,3858) ccw(c3789.33,3925.33) 3789.33,3830.11 U1.82@3927.88,3830.11
  Bottom Layer w0: U3.8@3692.22,3877.78 U3.8@3692.22,3889.29
BT_RXD: U1.86 U3.15 | length 453.1
  Top Layer w11.81: v3(3561,3864) 3588,3864 cw(c3588,3830) 3622,3830 3622,3779 ccw(c3649.63,3779) 3640.28,3753 ccw(c3649.63,3779) 3649.63,3751.37 U1.86@3927.88,3751.37
BT_STA: R6.2 U1.84 U3.9 | length 337.7
  Top Layer w11.81: v3(3721,3787) 3724.74,3790.74 U1.84@3927.88,3790.74
  Bottom Layer w8: R6.2@3676,3829.53 3676.48,3830 U3.9@3676.48,3889.29
  Bottom Layer w19.68: R6.2@3676,3829.53 3678.47,3829.53 cw(c3678.47,3787) v3(3721,3787)
BT_TXD: U1.87 U3.14 | length 411.7
  Top Layer w11.81: v3(3589,3824) 3589,3777 ccw(c3634.31,3777) 3634.31,3731.69 U1.87@3927.88,3731.69
FB: R1.1 R2.2 U5.9
GND: BT2.2 C1.1 C2.1 C3.1 C4.1 C5.1 C6.1 C7.1 C8.1 C9.1 C10.2 C11.1 C20.2 C21.1 C22.1 C23.1 C24.1 C26.2 C27.1 C28.1 C29.1 C30.1 C32.1 C33.2 C35.1 C36.2 C37.1 C38.1 C39.2 C40.1 C41.2 C42.2 C43.1 C44.1 C45.2 C46.1 C47.1 C48.1 C49.1 C50.1 C51.1 C52.1 C53.1 C54.2 C55.2 C56.2 C61.1 D4.1 OSC1.2 pad.0@3408,2621 pad.2@5016,3774 pad.5 R2.1 R10.1 R13.1 R14.1 R15.1 R22.1 R25.2 R47.2 U1.10 U1.19 U1.26 U1.49 U1.74 U1.94 U1.99 U3.0 U3.23 U3.24 U4.4 U4.5 U4.6 U5.4 U5.5 U5.7 U6.1 U7.8 USB.0 USB.5 | length 29214.7
  Top Layer w10: C50.1@3843,3505 ccw(c3852.54,3505) C50.1@3852.54,3495.46 ; C44.1@4310.44,3317 C43.1@4310.44,3267 ccw(c4312.72,3264.72) 4309.5,3264.72 OSC1.2@4309.5,3180.31 cw(c4361.87,3127.94) 4361.87,3202 C45.2@4377.88,3202 C42.2@4377.88,3152 C42.2@4378,3151.88 ; U1.26@4537.34,3475 ccw(c4537.34,3475.78) U1.26@4538.12,3475.78
  Top Layer w11.81: U1.10@4173.94,3406.88 4173.94,3477.94 v2(4174,3478)
  Top Layer w12: C44.1@4310.44,3317 cw(c4325.99,3317) 4315,3328 4341,3354 ccw(c4316.59,3378.41) 4351.11,3378.41 U1.19@4351.11,3406.88 ; U1.49@4538.12,3928.54 4634.54,3928.54 ccw(c4634.54,3932) C52.1@4638,3932
  Top Layer w40: C46.1@4138.44,3276 4064.29,3201.85 ccw(c4135,3131.14) 4035,3131.14 4035,2752.42 ccw(c4135,2752.42) 4064.29,2681.71 v1(4127,2619) 4128.71,2617.29 ccw(c4199.42,2688) 4199.42,2588 v1(4302,2588) v1(4378,2588) v1(4454,2588)
  Top Layer w50: 5201,4088 5201,4147 7006,4147 7006,2457 5306,2457 5306,4047 6906,4047 6906,2557 5406,2557 5406,3947 6806,3947 6806,2657 5506,2657 5506,3847 6706,3847 6706,2757 5606,2757 5606,3747 6606,3747 6606,2857 5706,2857 v5(5706,3537)
  Bottom Layer w7: 3569.01,4044 U3.0@3644.98,3968.03
  Bottom Layer w31.5: v2(4174,3478) v2@4176.59,3475.41
  Bottom Layer w45: pad.2@5016,3774 4942.29,3700.29 ccw(c5013,3629.58) 4913,3629.58 4913,3524.42 ccw(c5013,3524.42) 4942.29,3453.71 5004.14,3391.86 cw(c4933.43,3321.15) 5033.43,3321.15 C30.1@5033.43,2910
  Bottom Layer w50: v5(5020,3537) v5(5706,3537)
  other v1: 5076,2765 5141,2765 5206,2765 3854,3861
  other v2: 3366,3897 3366,3953.5 3366,4010 3366,4161 3436.5,4161 3507,4161
IMON: C11.2 R14.2 U1.34 U1.92 U7.9 | length 1922.4
  Top Layer w11.81: v3@3632,3633.26 U1.92@3927.88,3633.26 4330.56,3633.26 ccw(c4330.56,3649.44) v1(4342,3638) ; v1(4454,3638) ccw(c4465.44,3649.44) 4465.44,3633.26 U1.34@4538.12,3633.26
  Top Layer w20: 3792,2743 ccw(c3792,2760) v3(3809,2760)
  Bottom Layer w12: v3(3632,3633) 3632,2893.01 3633,2892.01 ccw(c3729.59,2892.01) 3661.29,2823.71 3695.71,2789.29 ccw(c3766.42,2860) 3766.42,2760 v3(3809,2760)
  Bottom Layer w30: v1(4342,3638) v1(4454,3638)
NetBT1_2: BT1.2 BT2.1 | length 426.1
  Top Layer w100: v6(3407,3517) BT1.2@3407,3730.07
  Bottom Layer w100: v6(3407,3517) BT2.1@3407,3730.07
NetC3_2: C3.2 U5.8 | length 62.5
  Bottom Layer w10: C3.2@4090,2665.56 cw(c4100.07,2665.56) 4100.07,2675.62 U5.8@4146.75,2675.62
NetC4_2: C4.2 C5.2 FB1.1 L1.1 U5.3
NetC7_2: C7.2 U7.7
NetC21_2: C21.2 R24.2
NetC22_2: C22.2 R23.1 U4.3
NetC25_2: C25.2 C26.1 C27.2 C33.1 C34.2 L03.2
NetC40_2: C40.2 U3.20 | length 99.8
  Bottom Layer w8: C40.2@3469.56,4007 3477.03,3999.53 U3.20@3566.24,3999.53
NetC51_2: C51.2 U1.73
NetC52_2: C52.2 U1.48 | length 108.8
  Top Layer w10: U1.48@4538.12,3908.85 4564.61,3908.85 cw(c4564.61,3808.85) 4635.32,3879.56 C52.2@4638,3876.88
NetC55_1: C55.1 C56.1 FB3.1 OSC1.4 R42.2
NetC60_2: C60.2 R45.1 R46.1 R47.1
NetD3_1: D3.1 R7.2
NetD3_2: D3.2 U3.6 | length 528.5
  Top Layer w50: D3.2@3731,3432 v3@3731,3486
  Bottom Layer w8: U3.6@3723.72,3936.54 3738.46,3936.54 cw(c3738.46,3919) 3756,3919 3756,3599.97 cw(c3715.03,3599.97) 3744,3571 ccw(c3780.21,3534.79) 3729,3534.79 v3(3729,3494)
NetL1_2: L1.2 U5.2 | length 159.4
  Bottom Layer w8: L1.2@4184.35,2868 cw(c4184.35,2859.35) 4193,2859.35 U5.2@4193,2713.5
NetL2_2: L2.2 U3.4 | length 84.6
  Bottom Layer w8: U3.4@3723.72,3968.03 3801.97,3968.03 cw(c3801.97,3964) L2.2@3806,3964
NetL03_1: L03.1 U4.8
NetOSC1_1: OSC1.1 R42.1
NetOSC1_3: OSC1.3 U1.12 | length 235.4
  Top Layer w10: U1.12@4213.31,3406.88 4213.31,3370.52 ccw(c4280.52,3370.52) 4233,3323 cw(c4200.4,3290.4) 4246.5,3290.4 OSC1.3@4246.5,3180.31
NetR8_1: R8.1 R9.2 U7.1
NetR9_1: R9.1 R10.2 U7.2
NetR21_1: R21.1 R22.2 R24.1 U4.2 Y4.2 | length 67.6
  Top Layer w24: R24.1@4710.43,2911 cw(c4710.43,2908.43) 4713,2908.43 4713,2904.77 R22.2@4713,2857 ; Y4.2@4710.43,3150.43 Y4.2@4719,3159
NetR23_2: R23.2 U4.7 Y4.1
NetU3_1: U3.1 Y2.2
NetU3_2: U3.2 Y2.1 | length 166.9
  Bottom Layer w8: U3.2@3723.72,3999.53 3738.55,3999.53 ccw(c3738.55,4028.45) 3759,4008 3782.03,4031.03 ccw(c3711.32,4101.75) 3811.32,4101.75 Y2.1@3811.32,4120
NetU3_18: U3.18 Y1.1 | length 175.2
  Bottom Layer w8: Y1.1@3419.38,3899.8 Y1.1@3419.38,3899.44 3442.13,3926.87 ; 3442,3927 3491,3927 ccw(c3491,3953.56) 3509.78,3934.78 3537,3962 cw(c3551.56,3947.44) 3551.56,3968.03 U3.18@3566.24,3968.03
NetU3_19: U3.19 Y1.3 | length 107.4
  Bottom Layer w8: Y1.3@3466.62,3954.56 cw(c3537.17,3884.02) 3537.17,3983.78 U3.19@3566.24,3983.78
PG: R11.2 U7.3
  other v4: 3740,2882
PGTH: R12.2 R15.2 U1.33 U1.93 U7.4 | length 1682.4
  Top Layer w11.81: v3(3602,3562.59) 3623.7,3584.29 cw(c3694.41,3513.57) 3694.41,3613.57 U1.93@3927.88,3613.57 4135.13,3613.57 cw(c4135.13,3591.13) 4151,3607 ccw(c4170.31,3626.31) 4170.31,3599 v1(4342,3599) ; v1(4454,3599) cw(c4489.19,3563.81) 4489.19,3613.57 U1.33@4538.12,3613.57
  Top Layer w27: v2@3601,3019 3601,2948.57 ccw(c3669.55,2948.57) 3613.6,2908.95 ccw(c3669.55,2948.57) R12.2@3669.55,2880.02
  Bottom Layer w12: v2(3602,3019) v3(3602,3562.59)
  Bottom Layer w30: v1(4342,3599) v1(4454,3599)
R\S\T\: C54.1 pad.4 R41.1 U1.14 | length 1040.7
  Top Layer w11.81: U1.14@4252.68,3406.88 4252.68,3458.93 cw(c4281.07,3458.93) v2(4261,3479)
  Bottom Layer w30: R41.1@4261,3254 C54.1@4261,3309 v2(4261,3479) 4261,3926 cw(c4361,3926) 4361,4026 4371.01,4026 ccw(c4371.01,4107) pad.4@4452.01,4107
RFID: C10.1 C20.1 C60.1 D2.1 pad.2@4768,3844 R13.2
TCK: pad.3 U1.76 | length 507.6
  Top Layer w11.81: U1.76@3927.88,3948.22 v3(4214.22,3948.22)
  Bottom Layer w11.81: v3(4214.22,3948.22) cw(c4313.18,3948.22) 4243.18,4018.17 ; 4243.21,4018.2 4317.87,4092.86 cw(c4352,4058.73) pad.3@4352,4107
TMS: pad.2@4252,4107 U1.72 | length 259.4
  Top Layer w11.81: U1.72@4055.83,4017.12 4055.83,4044.83 cw(c4069,4044.83) 4069,4058 4203,4058 ccw(c4203,4107) pad.2@4252,4107
UD+: U3.12 USB.3 | length 1400.2
  Bottom Layer w8: 3629.23,3737 U3.12@3629.23,3889.29
  Bottom Layer w12: 3630,3737 3630,3721.42 cw(c3530,3721.42) 3600.71,3650.71 3595.29,3645.29 ccw(c3666,3574.58) 3566,3574.58 3566,3406.53 cw(c3485.05,3406.53) 3542.29,3349.29 ccw(c3613,3278.58) 3513,3278.58 3513,3052.42 ccw(c3613,3052.42) 3542.29,2981.71 3558,2966 cw(c3490.4,2898.4) 3586,2898.4 3586,2839.42 ccw(c3686,2839.42) 3615.29,2768.71 3708.21,2675.79 cw(c3674.92,2642.5) 3722,2642.5 USB.3@3722,2593
UD-: U3.13 USB.2 | length 1470.3
  Top Layer w30: v3(3485,3205) v3(3542,3205)
  Bottom Layer w8: 3613.48,3763 U3.13@3613.48,3889.29 U3.13@3613.48,3901
  Bottom Layer w12: v3(3485,3205) 3485,3297.58 cw(c3585,3297.58) 3514.29,3368.29 ccw(c3466.7,3415.88) 3534,3415.88 3534,3582.58 cw(c3634,3582.58) 3563.29,3653.29 3581.71,3671.71 ccw(c3511,3742.42) 3611,3742.42 3611,3763 ; v3(3542,3205) 3542,3063.42 ccw(c3642,3063.42) 3571.29,2992.71 3585,2979 cw(c3529.47,2923.47) 3608,2923.47 3608,2852.42 ccw(c3708,2852.42) 3637.29,2781.71 3718.3,2700.7 cw(c3647.59,2629.99) 3747.59,2629.99 USB.2@3747.59,2593
VBAT: BT1.1 C8.2 R8.2 U7.5 | length 21.2
  Top Layer w30: BT1.1@3407,2863.93 BT1.1@3422,2848.93
VCC_5_RF: C28.2 C30.2 C36.1 R21.2 U4.1 U6.2 U6.4
  other v4: 4870,3011
Vcc_un: C1.2 C2.2 C9.2 C29.2 C32.2 D1.1 pad.0@3966,2800 R12.1 U5.1 U5.6 U5.10 U6.3 U7.6 | length 576.4
  Top Layer w30: R12.1@3669.55,2919.39 3669.55,2963.55 cw(c3671,2963.55) v1(3671,2965)
  Bottom Layer w8: U5.1@4173.25,2720 U5.6@4173.25,2657.5 4173.25,2609 C2.2@4173.63,2609
  Bottom Layer w30: C2.2@4173.63,2609 4173.63,2555.55 ccw(c4188.55,2555.55) 4178,2545
  Bottom Layer w80: 3936,2728.58 3936,2654.42 ccw(c4036,2654.42) 3965.29,2583.71 3977.71,2571.29 ccw(c4048.42,2642) 4048.42,2542 C1.2@4153,2542
  other v1: 4709,2572 4709,2624.5 4709,2677
VDD_A: C38.2 C39.1 L2.1 U3.3 U3.22 | length 524.3
  Top Layer w30: v1(3578,4151) 3805,4151 cw(c3805,4082) v1(3874,4082)
  Bottom Layer w8: C39.1@3580.51,4108 cw(c3580.51,4090.77) 3597.74,4090.77 U3.22@3597.74,4046.77 ; U3.3@3723.72,3983.78 3740.25,3983.78 ccw(c3740.25,4035.75) 3777,3999 cw(c3827.7,3948.3) 3827.7,4020 C38.2@3831.88,4020
Vin+: C23.2 C24.2 C25.1 C34.1 C35.2 D2.2 pad.2@5111,4156 R25.1
VUSB: D1.2 USB.1 | length 113.8
  Bottom Layer w12: USB.1@3773.18,2593 3773.18,2607.76 cw(c3873.18,2607.76) 3802.47,2678.47 D1.2@3817,2693
pads on no net: ANT1.2 U1.1 U1.2 U1.3 U1.4 U1.5 U1.7 U1.8 U1.9 U1.13 U1.15 U1.16 U1.17 U1.18 U1.22 U1.23 U1.24 U1.25 U1.28 U1.29 U1.30 U1.31 U1.32 U1.36 U1.37 U1.38 U1.39 U1.40 U1.41 U1.42 U1.43 U1.44 U1.45 U1.46 U1.47 U1.51 U1.52 U1.53 U1.54 U1.55 U1.56 U1.57 U1.58 U1.59 U1.60 U1.61 U1.62 U1.63 U1.64 U1.65 U1.66 U1.67 U1.68 U1.69 U1.70 U1.71 U1.77 U1.78 U1.79 U1.80 U1.81 U1.85 U1.88 U1.89 U1.90 U1.91 U1.95 U1.96 U1.97 U1.98 U3.7 U3.10 U3.11 U3.17 U3.25 U3.26 U3.27 U3.28 U7.10 USB.4 Y1.2 Y1.4

## Polygon pours and split planes (outlines as drawn)
3.3V on Top Layer "3.3V_L01_P014" (solid, remove dead copper, pour order 14): 4486.28,3926.24 4497.23,3937.19 cw(c4507.5,3926.92) 4507.5,3941.44 4530.3,3941.44 ccw(c4530.3,3950.92) 4537,3944.22 4537,3992 4528.67,3992 cw(c4528.67,3999.95) 4523.04,3994.33 cw(c4495.7,4021.68) 4495.69,3983 4480,3983 4446,3983 4137,3983 4022,3983 4003,3983 4003,3997 4003,4057 ccw(c3998,4057) 3998,4062 3976,4062 cw(c3976,4070) 3968,4070 3968,4106 ccw(c3960,4106) 3960,4114 3939,4114 ccw(c3939,4104) 3929,4104 3929,3976 ccw(c3941,3975.99) 3941,3964 4232,3964 cw(c4232,3954) 4242,3954 4242,3696 ccw(c4267,3696) 4267,3671 4359,3671 cw(c4359,3656) 4374,3656 4374,3578 cw(c4354,3578) 4354,3558 4235,3558 ccw(c4235,3545) 4222,3545 4222,3501.49 cw(c4201.52,3501.48) 4216,3487 4229,3487 cw(c4233.83,3487) 4230.41,3490.41 4235,3495 cw(c4266.38,3463.62) 4266.38,3508 4355,3508 cw(c4355,3498) 4365,3498 ccw(c4372,3498) 4367.05,3493.05 ccw(c4376.83,3502.83) 4376.83,3489 4499,3489 4499,3502 cw(c4499,3545.46) 4468.27,3514.73 4439.88,3543.12 cw(c4465.77,3569) 4429.16,3569 4429.13,3623 4429.13,3648.13 cw(c4453,3648.13) 4453,3672 ccw(c4453,3694) 4475,3694 4475,3899 cw(c4513.53,3899)
NetR9_1 on Top Layer "NETR9_1_L01_P192" (solid, remove dead copper, pour order 192): 3764,2889 3764,2891 cw(c3771,2891) 3771,2898 3792.5,2898 ccw(c3792.5,2905.5) 3800,2905.5 3800,2910 cw(c3802,2910) 3802,2912 3825,2912 3825,2889 3821,2889 ccw(c3821,2867.28) 3805.64,2882.64 3797.07,2874.07 cw(c3780,2891.14) 3780,2867 ccw(c3780,2857.35) 3773.17,2864.17 ccw(c3778.12,2859.05) 3771,2859.17 3771,2835 cw(c3769,2835) 3769,2833 3762,2833 cw(c3762,2835) 3760,2835 3760,2854.17 cw(c3766.83,2854.17) 3762,2859 ccw(c3757.17,2863.83) 3764,2863.83
PGTH on Top Layer "PGTH_L01_P202" (solid, pour order 202): 3658,2847 3658,2851.72 ccw(c3640.43,2851.72) 3652.85,2864.15 3647.71,2869.29 ccw(c3646,2867.59) 3646,2870 cw(c3665.49,2870) 3651.71,2883.78 3659.46,2891.54 cw(c3663,2888) 3663,2893 3713,2893 cw(c3713,2890) 3716,2890 3716,2862 ccw(c3721,2862) 3721,2857 3733,2857 cw(c3733,2855) 3735,2855 3735,2835 cw(c3733,2835) 3733,2833 3672,2833 cw(c3672,2847)
GND on Top Layer "Top Layer-GND 2" (solid, pour order 98): 3694,3033 ccw(c3680,3033) 3680,3047 3181,3047 ccw(c3181,3032) 3166,3032 3166,2956 3166,2705 ccw(c3196,2705) 3196,2675 3610,2675 ccw(c3610,2689) 3624,2689 3624,2763 cw(c3632,2763) 3632,2771 3684,2771 cw(c3684,2766) 3689,2766 3689,2724 ccw(c3697,2724) 3697,2716 3736,2716 ccw(c3736,2722) 3742,2722 3742,2784 cw(c3744,2784) 3744,2786 3752,2786 cw(c3752,2784) 3754,2784 3754,2722 ccw(c3760,2722) 3760,2716 3817.01,2716 ccw(c3817.13,2727.07) 3828.19,2726.95 3828.19,2746.19 cw(c3832,2746.19) 3832,2750 3920,2750 cw(c3920,2733) 3937,2733 3937,2590.18 ccw(c4029.18,2590.18) 3964,2525 3992.71,2496.29 ccw(c4063.42,2567) 4063.42,2467 4745,2467 ccw(c4745,2494) 4772,2494 4772,2762 5222,2762 5222,2445 cw(c5197,2445) 5197,2420 3387,2420 cw(c3387,2442) 3365,2442 3365,2626 ccw(c3345,2626) 3345,2646 3166,2646 cw(c3166,2674) 3138,2674 3138,3080 cw(c3165,3080) 3165,3107 3775,3107 cw(c3775,3090) 3792,3090 3792,2917 cw(c3785,2917) 3785,2910 3777,2910 cw(c3777,2920) 3767,2920 3767,2995 ccw(c3759,2995) 3759,3003 3725,3003 ccw(c3725,2994) 3716,2994 3716,2910 cw(c3712,2910) 3712,2906 3699,2906 cw(c3699,2911) 3694,2911
PG on Top Layer "PG_L01_P200" (solid, pour order 200): 3753,2916 ccw(c3750,2916) 3750,2919 3734,2919 ccw(c3734,2915) 3730,2915 3730,2901.83 cw(c3723.17,2901.83) 3728,2897 ccw(c3732.83,2892.17) 3726,2892.17 3726,2876 ccw(c3735,2876) 3735,2867 3738,2867 cw(c3738,2863) 3742,2863 3742,2835 ccw(c3744,2835) 3744,2833 3753,2833
VBAT on Top Layer "VBAT_L01_P196" (solid, pour order 196): 3561,2784.64 3562.88,2784.64 ccw(c3562.88,2796.12) 3571,2788 cw(c3580.65,2778.35) 3580.66,2792 3682,2792 ccw(c3682,2797) 3687,2797 3687,2806 cw(c3694,2806) 3694,2813 3854,2813 ccw(c3854,2817) 3858,2817 3858,2836 ccw(c3853,2836) 3853,2841 3838,2841 ccw(c3837.99,2833.77) 3832.88,2838.88 3827,2833 cw(c3810.1,2849.89) 3810.1,2826 3665,2826 3580,2826 cw(c3580,2831) 3575,2831 3575,2895 ccw(c3567,2895) 3567,2903 3561,2903
NetR8_1 on Top Layer "NETR8_1_L01_P194" (solid, remove dead copper, pour order 194): 3863,2913 cw(c3863,2909) 3867,2909 3867,2861 cw(c3860,2861) 3860,2854 3836.49,2854 ccw(c3836.49,2833.52) 3822,2848 3811.24,2837.24 cw(c3801,2847.49) 3801,2833 3779,2833 cw(c3779,2834) 3778,2834 3778,2856 cw(c3779,2856) 3779,2857 ccw(c3779,2890.8) 3802.9,2866.9 3805,2869 cw(c3829.14,2844.86) 3829.14,2879 3833,2879 ccw(c3833,2885) 3839,2885 3839,2909 cw(c3843,2909) 3843,2913
IMON on Top Layer "IMON_L01_P190" (solid, remove dead copper, pour order 190): 3761,2786 ccw(c3761,2785) 3760,2785 3760,2730 ccw(c3763,2730) 3763,2727 3812,2727 ccw(c3812,2730) 3815,2730 3815,2751 ccw(c3813,2751) 3813,2753 3775,2753 cw(c3775,2757) 3771,2757 3771,2784 ccw(c3769,2784) 3769,2786
NetC7_2 on Top Layer "NETC7_2_L01_P188" (solid, remove dead copper, pour order 188): 3728,2729 ccw(c3728,2736) 3735,2736 3735,2780 ccw(c3729,2780) 3729,2786 3712,2786 ccw(c3712,2779) 3705,2779 3705,2736 ccw(c3712,2736) 3712,2729
3.3V on Top Layer "Top Layer-3.3V" (solid, pour order 168): 3964,3198 ccw(c3964,3214) 3980,3214 3980,3299 cw(c3994,3299) 3994,3313 4118,3313 ccw(c4118,3319) 4124,3319 4124,3348 ccw(c4119,3348) 4119,3353 4111,3353 cw(c4111,3363) 4101,3363 4089,3363 4089,3358 cw(c4084,3358) 4084,3353 3868,3353 cw(c3868,3359) 3862,3359 3862,3461 cw(c3870,3461) 3870,3469 3950,3469 ccw(c3950,3472) 3953,3472 3953,3479 ccw(c3950,3479) 3950,3482 3830,3482 ccw(c3830,3476) 3824,3476 3824,3245 cw(c3812,3245) 3812,3233 3710,3233 ccw(c3710,3228) 3705,3228 3705,3202 ccw(c3709,3202) 3709,3198
GND on Top Layer "Top Layer-GND" (solid, pour order 134): 4493.61,3053.15 cw(c4451.61,3011.16) 4511,3011.16 4511,2639 4646,2639 4646,2732 cw(c4662,2732) 4662,2748 5199.69,2748 ccw(c5199.69,2775.31) 5219,2756 ccw(c5211.76,2763.24) 5222,2763.24 5222,2783 ccw(c5197.86,2783) 5214.93,2800.07 5156.36,2858.64 ccw(c5141,2843.27) 5141,2865 5066,2865 ccw(c5066,2851) 5052,2851 5052,2831 cw(c5036,2831) 5036,2815 4875,2815 ccw(c4875,2790.86) 4857.93,2807.93 4855,2805 cw(c4826.03,2833.97) 4826.03,2793 4769.23,2793 cw(c4768.81,2814.89) 4753.63,2799.11 ccw(c4737,2788) 4737,2808 4619,2808 cw(c4619,2831) 4596,2831 4596,2941 cw(c4618,2941) 4618,2963 4674,2963 ccw(c4674,2968) 4679,2968 4679,3075 ccw(c4669,3075) 4669,3085 4550,3085 cw(c4550,3100) 4535,3100 4535,3244 cw(c4550,3244) 4550,3259 5068,3259 ccw(c5068,3288) 5097,3288 5097,3946 ccw(c5077,3946) 5077,3966 4945,3966 ccw(c4945,3959) 4938,3959 4938,3690 ccw(c4948,3690) 4948,3680 4995,3680 cw(c4995,3666) 5009,3666 5009,3615 cw(c5005,3615) 5005,3611 4985,3611 ccw(c4985,3602) 4976,3602 4976,3383 cw(c4942,3383) 4942,3349 4529.31,3349 ccw(c4529.31,3321.69) 4510,3341 4495.19,3326.19 ccw(c4517.38,3304) 4486,3304 4486,3091.38 ccw(c4585.91,3091.38)
NetC60_2 on Top Layer "Top Layer-NetC60_2" (solid, pour order 132): 4810,3682 ccw(c4819,3682) 4819,3673 4917,3673 ccw(c4917,3680) 4924,3680 4924,3780 ccw(c4918,3780) 4918,3786 4814,3786 ccw(c4814,3782) 4810,3782